# EAGLE board 214_oled (EAGLE 9.1.0)
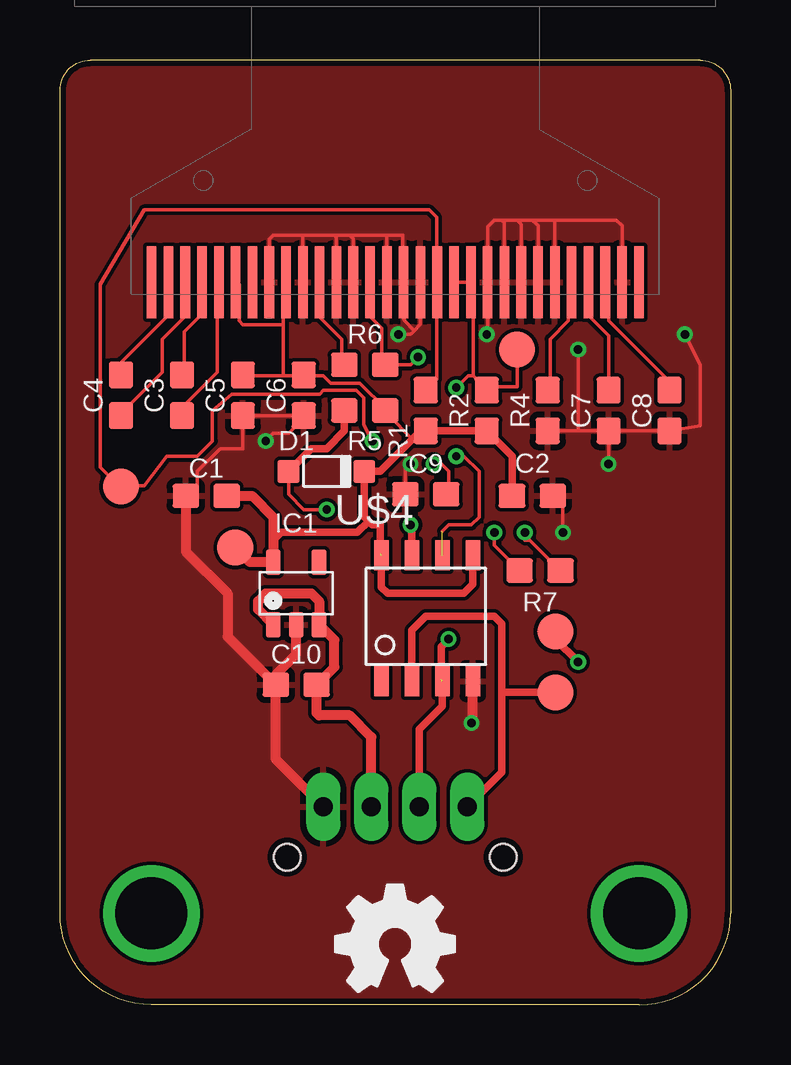
[diagram p0: board, top side]
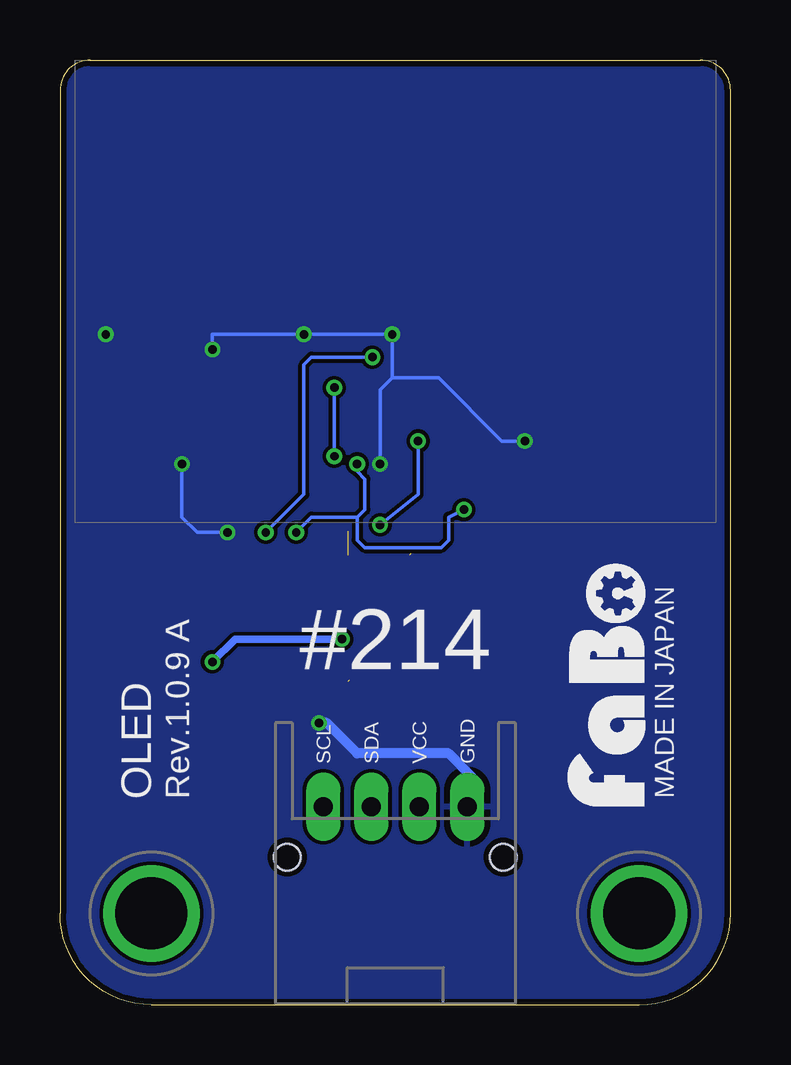
[diagram p1: board, bottom side, seen from below]

Size 27.94 x 39.37 mm. Coordinates in mm from the lower left corner, seen from the top.
Copper layers (1*16): Top 0.035mm / dielectric 1.5mm / Bottom 0.035mm
Design rules "SeeedStudio_2layer_DRU_no_angle_20140221": minimum track width 6mil, minimum drill 12mil, track to track 6mil, track to pad 6mil, pad to pad 6mil, via to via 6mil, smd to smd 0mil, copper to edge 10mil, drill to drill 10mil, minimum pad ring 10mil, minimum via ring 6mil, stop-mask expansion 2mil, vias tented up to drill 100mil, thermal gap 10mil

## Footprints (pad centres in the part's own frame; a part is rotated, then mirrored left to right if it is on the bottom)
0603 = smd 1.1 x 1: 1 -0.85,0; 2 0.85,0
1N4148W = smd 0.9 x 0.95: ANODE 0,0; CATHODE 3.15,0
SOT-23-5 = smd 0.6 x 1.05: 1 -0.95,-1.3; 2 0,-1.3; 3 0.95,-1.3; 4 0.95,1.3; 5 -0.95,1.3
FABO_BRICK_I2C_OLED = drill 0.8 pad 1.422 long: GND 3,-10.795; SCL -3,-10.795; SDA -1,-10.795; VCC 1,-10.795 | drill 3 pad 3.81: P$1 -10.16,-15.24; P$2 10.16,-15.24 | hole 1.1: -4.5,-12.895; 4.5,-12.895
TP-15 = smd 1.5 x 1.5: 1 0,0
ER-OLED0.96-1 = smd 0.4 x 3: 1 -10.15,-0.5; 2 -9.45,-0.5; 3 -8.75,-0.5; 4 -8.05,-0.5; 5 -7.35,-0.5; 6 -6.65,-0.5; 7 -5.95,-0.5; 8 -5.25,-0.5; 9 -4.55,-0.5; 10 -3.85,-0.5; 11 -3.15,-0.5; 12 -2.45,-0.5; 13 -1.75,-0.5; 14 -1.05,-0.5; 15 -0.35,-0.5; 16 0.35,-0.5; 17 1.05,-0.5; 18 1.75,-0.5; 19 2.45,-0.5; 20 3.15,-0.5; 21 3.85,-0.5; 22 4.55,-0.5; 23 5.25,-0.5; 24 5.95,-0.5; 25 6.65,-0.5; 26 7.35,-0.5; 27 8.05,-0.5; 28 8.75,-0.5; 29 9.45,-0.5; 30 10.15,-0.5
SO8 = smd 0.6 x 1.25: 1 -1.85,-2.7; 2 -0.58,-2.7; 3 0.69,-2.7; 4 1.96,-2.7; 5 1.96,2.55; 6 0.69,2.55; 7 -0.58,2.55; 8 -1.85,2.55

## Placement (x,y rotation side)
C1  1uF  [0603]  6.1,21.21 0 top
C2  0.1uF  [0603]  19.68,21.21 180 top
C3  1uF  [0603]  5.08,25.4 90 top
C4  1uF  [0603]  2.54,25.4 90 top
C5  1uF  [0603]  7.62,25.4 90 top
C6  1uF  [0603]  10.16,25.4 90 top
C7  10uF  [0603]  22.86,24.77 90 top
C8  10uF  [0603]  25.4,24.77 90 top
C9  10uF  [0603]  15.24,21.27 0 top
C10  1uF  [0603]  9.84,13.34 0 top
D1  1N4148  [1N4148W]  9.53,22.23 0 top
IC1  [SOT-23-5]  9.84,17.14 0 top
J1  [FABO_BRICK_I2C_OLED]  13.97,19.05 0 bottom
R1  1.8k  [0603]  15.24,24.77 270 top
R2  1.8k  [0603]  17.78,24.77 270 top
R4  390k  [0603]  20.32,24.77 90 top
R5  10k  [0603]  12.7,24.77 0 top
R6  0  [0603]  12.7,26.67 0 top
R7  100  [0603]  20,18.1 180 top
TP1  [TP-15]  19.05,27.3 0 top
TP2  [TP-15]  2.54,21.59 0 top
TP3  [TP-15]  20.64,15.56 0 top
TP4  [TP-15]  20.64,13.02 0 top
TP5  [TP-15]  7.3,19.05 0 top
U1  [ER-OLED0.96-1]  13.97,30.61 0 top
U$2  [LOGO_OSHW_M]  13.97,2.54 0 top
U$3  [LOGO_FABO_MS_BOTTOM]  3.17,13.34 270 top
U$4  PCA9515  [SO8]  15.24,16.19 0 top

## Library data of the parts
C1-C10 = FaBo-Capacitor
D1 = FaBo-Diode
IC1 TP1-TP5 = FaBo-Supply
J1 = FaBo-Template
R1 R2 R4-R7 = FaBo-Resistors
U1 = FaBo-Parts
U$2 U$3 = FaBo-etc
U$4 = FaBo-Repeater

## Nets
3V3: C1.2 C2.2 C5.2 C6.2 D1.CATHODE IC1.5 R1.2 R2.2 R5.2 TP5.1 U1.6 U1.9 U$4.5 U$4.8
5V: C10.2 IC1.1 IC1.3 J1.VCC
GND: C1.1 C2.1 C5.1 C6.1 C7.1 C8.1 C9.1 C10.1 IC1.2 J1.GND R4.1 U1.8 U1.10 U1.12 U1.13 U1.15 U1.16 U1.17 U1.21 U1.22 U1.23 U1.24 U1.25 U1.29 U$4.4
N$1: C3.2 U1.4
N$2: C3.1 U1.5
N$3: C4.1 U1.3
N$4: C4.2 U1.2
N$5: R4.2 U1.26
N$6: C7.2 U1.27
N$7: C8.2 U1.28
N$9: R6.1 U1.11
N$10: R6.2 R7.1 U1.14
N$12: C9.2 D1.ANODE R5.1 R7.2
SCL: R1.1 TP2.1 U1.18 U$4.7
SCL_HV: J1.SCL TP4.1 U$4.2
SDA: R2.1 TP1.1 U1.19 U1.20 U$4.6
SDA_HV: J1.SDA TP3.1 U$4.3

## Tracks (layer width: path | path; a pad name or v marks a point on that pad's centre or on a via)
3V3  (1 unrouted)
  Top 0.152: 9.3,26.21 10.06,26.21 C6.2 10.21,26.21 10.97,26.21 11.28,25.91 12.5,25.91 13.56,24.84 R5.2 13.56,24.69 14.78,23.47 14.94,23.47 | 9.3,26.21 7.62,26.21 C5.2 | 9.3,28.35 9.3,30.02 U1.9 | 9.3,28.35 9.3,26.21 | 9.3,28.35 7.62,28.35 7.47,28.5 7.47,30.02 U1.6 | 7.01,21.18 C1.2 | 14.94,23.47 15.24,23.77 R1.2 | 12.8,22.1 D1.CATHODE | 17.68,23.93 R2.2 | 15.24,23.93 R1.2 | 14.94,23.47 15.19,23.84 R1.2
  Top 0.305: 13.34,18.8 13.34,20 13.02,20 12.86,20.16 | 12.86,20.16 12.68,20.34 D1.CATHODE 13.34,22.23 14.96,23.84 15.19,23.84 | C2.2 18.84,22.54 18.84,22.86 R2.2 R1.2 | 8.89,19.37 9.21,19.68 12.38,19.68 12.86,20.16 | U$4.8 13.39,17.41 13.65,17.14 16.83,17.14 17.2,17.52 U$4.5
  Top 0.406: TP5.1 7.91,18.45 IC1.5 8.89,19.37 8.89,20.32 8,21.21 C1.2
5V
  Top 0.152: 12.95,8.38 J1.VCC
  Top 0.406: J1.VCC 12.97,11.16 12.06,12.06 10.79,12.06 10.69,12.17 C10.2 11.43,14.07 11.43,15.21 IC1.3 | 10.69,15.74 IC1.3 | IC1.1 8.26,16.48 8.26,16.83 8.57,17.14 10.48,17.14 10.79,16.83 IC1.3
GND  (via drill 0.35)
  Top 0.152: v17.78,27.94 17.82,27.94 U1.21 17.82,32.42 18.1,32.7 18.41,32.7 | v21.59,27.3 21.59,23.91 | 21.59,23.91 R4.1 | v26.04,27.94 26.67,26.67 26.67,24.13 C8.1 C7.1 | U1.8 8.72,31.9 8.89,32.07 10.16,32.07 | 10.16,32.07 11.43,32.07 | 11.43,32.07 12.06,32.07 | 12.06,32.07 13.65,32.07 | 13.65,32.07 14.29,32.07 14.29,30.14 U1.16 14.32,28.54 14.76,28.1 | U1.10 10.12,32.03 10.16,32.07 | U1.13 12.22,31.91 12.06,32.07 | U1.12 11.52,31.98 11.43,32.07 | U1.15 13.62,32.03 13.65,32.07 | 20.64,32.7 23.18,32.7 23.42,32.46 U1.29 | 20.64,32.7 19.68,32.7 | 19.68,32.7 19.05,32.7 | 19.05,32.7 18.41,32.7 | U1.25 20.62,32.69 20.64,32.7 | U1.24 19.92,32.47 19.68,32.7 | U1.23 19.22,32.53 19.05,32.7 | U1.22 18.52,32.6 18.41,32.7 | C1.1 5.71,21.68 5.71,22.23 6.67,23.18 7.62,23.18 C5.1 C6.1 10.16,24.45 9.53,23.81 8.89,23.81 v8.57,23.5 | 21.59,23.91 C7.1 | C2.1 20.95,20.79 20.95,20.32 v20.95,19.68 | v22.86,22.54 C7.1 | v14.1,27.94 14.61,27.94 14.76,28.1 | 14.76,28.1 15.02,28.36 U1.17 | C9.1 14.39,22.33 v14.61,22.54
  Top 0.406: J1.GND 8.99,10.23 C10.1 | C10.1 8.99,13.76 9.84,14.61 IC1.2 | C1.1 5.25,18.88 6.99,17.14 6.99,15.34 C10.1 | v17.14,11.75 17.2,11.8 U$4.4
  Bottom 0.152: 14.1,26.14 v14.1,27.94 v17.78,27.94 21.59,27.94 v21.59,27.3 | 14.1,26.14 12.17,26.14 9.53,23.5 v8.57,23.5 | v20.95,19.68 22.23,19.68 22.86,20.32 v22.86,22.54 | 14.1,26.14 14.61,25.63 v14.61,22.54
  Bottom 0.406: J1.GND 10.79,8.43 10.79,9.53 11.75,10.48 15.56,10.48 16.83,11.75 v17.14,11.75
  pour Bottom: 0,0 27.94,0 27.94,39.37 0,39.37
  pour Top: 0,0 27.94,0 27.94,39.37 0,39.37
N$1
  Top 0.152: C3.2 5.18,26.36 5.18,28.04 5.79,28.65 5.79,30.02 U1.4
N$2
  Top 0.152: C3.1 5.18,24.69 5.18,24.99 6.55,26.36 6.55,30.02 U1.5
N$3
  Top 0.152: C4.1 2.59,24.69 4.27,26.36 4.27,27.74 5.18,28.65 5.18,30.02 U1.3
N$4
  Top 0.152: C4.2 2.59,26.36 2.59,26.82 4.42,28.65 4.42,30.02 U1.2
N$5
  Top 0.152: R4.2 20.42,25.76 20.42,27.74 21.18,28.5 21.18,30.02 U1.26
N$6
  Top 0.152: C7.2 22.86,27.89 22.1,28.65 22.1,30.02 U1.27
N$7
  Top 0.152: C8.2 25.3,25.76 25.3,26.06 22.86,28.5 22.86,30.02 U1.28
N$9
  Top 0.152: R6.1 11.73,26.67 11.73,27.74 10.82,28.65 10.82,30.02 U1.11
N$10  (via drill 0.35)
  Top 0.152: U1.14 12.95,30.02 12.95,28.65 13.34,28.26 13.41,28.19 13.41,26.67 R6.2 14.61,26.67 v14.92,26.99 | R7.1 19.58,19.37 19.37,19.37 v19.37,19.68
  Bottom 0.152: v19.37,19.68 17.78,21.27 17.78,26.67 17.46,26.99 v14.92,26.99
N$12  (via drill 0.35)
  Top 0.152: 9.6,22.55 9.6,22.25 D1.ANODE 9.53,21.27 10.16,20.64 v11.11,20.64 | 11.73,24.69 R5.1 | R7.2 18.1,19.15 v18.1,19.68 | 15.88,21.49 15.98,21.38 | 15.98,21.38 C9.2 | v15.56,22.54 15.88,22.54 16.19,22.23 16.19,21.59 15.98,21.38
  Top 0.305: D1.ANODE 10.48,23.18 11.11,23.18 11.85,23.91 R5.1
  Bottom 0.152: v18.1,19.68 17.46,20.32 15.56,20.32 | 15.56,20.32 15.24,20.64 15.24,21.91 15.56,22.23 v15.56,22.54 | 15.56,20.32 15.56,19.37 15.24,19.05 12.06,19.05 11.75,19.37 11.75,20.32 v11.11,20.64
SCL  (via drill 0.35)
  Top 0.152: R1.1 15.7,26.07 15.7,30.02 U1.18 15.7,30.18 15.7,32.82 15.39,33.12 3.5,33.12 1.68,30.02 1.68,22.4 2.44,21.64 TP2.1 2.59,21.64 3.5,21.64 4.45,22.86 5.71,22.86 6.35,23.5 6.35,24.77 7.16,25.45 10.82,25.45 10.97,25.6 12.34,25.6 12.65,25.3 12.65,24.18 v13.02,23.5
  Top 0.305: v14.61,20 14.66,19.95 U$4.7
  Bottom 0.152: v14.61,20 13.02,21.27 v13.02,23.5
SCL_HV
  Top 0.305: J1.SCL 18.41,9.7 18.41,13.02 | TP4.1 18.41,13.02 | 18.41,13.02 18.41,15.88 18.1,16.19 15.24,16.19 14.66,15.61 U$4.2
SDA  (via drill 0.35)  (1 unrouted)
  Top 0.152: U1.19 U1.20 17.22,30.02 17.22,26.21 | 17.68,25.76 17.22,26.21 | 17.68,25.76 R2.1 | 17.68,25.76 19.05,25.76 TP1.1 | 15.93,19.74 16.19,20 17.14,20 17.46,20.32 17.46,22.23 16.83,22.86 v16.51,22.86 | v16.51,25.72 17,26.21 17.22,26.21
  Bottom 0.152: v16.51,22.86 v16.51,25.72
SDA_HV  (via drill 0.35)  (1 unrouted)
  Top 0.305: J1.SDA 14.97,11.48 15.93,12.44 | 15.88,13.55 15.88,14.92 v16.19,15.24 | v21.59,14.29 20.64,15.24 TP3.1 | 15.93,12.44 | 15.93,12.44 U$4.3
  Bottom 0.305: v16.19,15.24 20.64,15.24 v21.59,14.29

## Text on the board
bPlace: #214 | MADE IN JAPAN | Rev.1.0.9 A | OLED